# Allegro board LM3409 LED Driver for PC Flashlight.brd
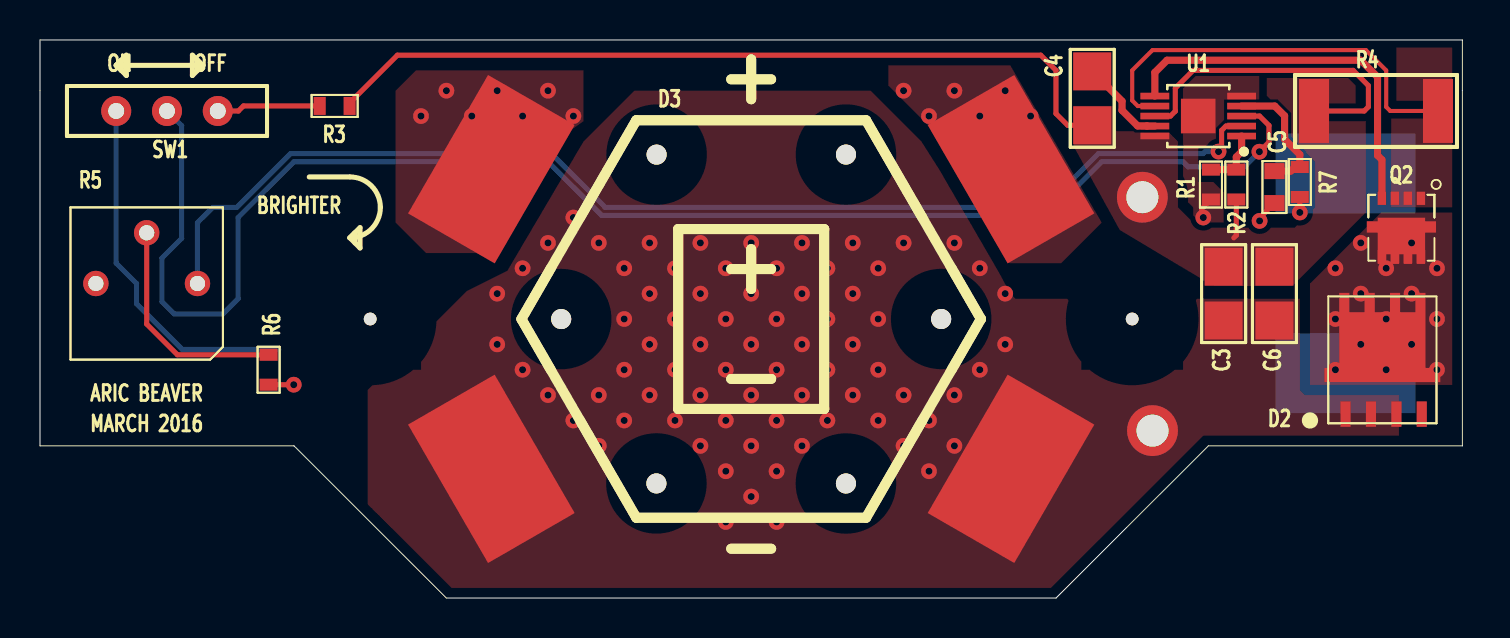
[diagram p0: board, top side]
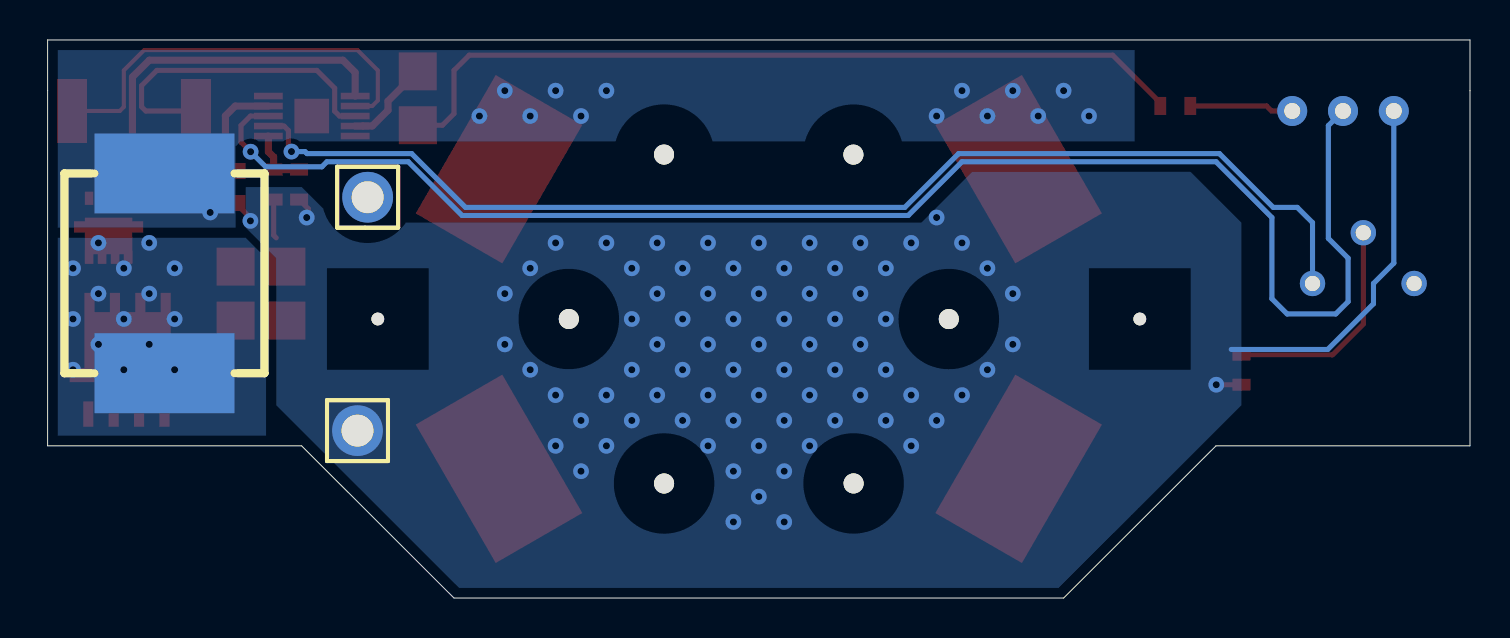
[diagram p1: board, bottom side, seen from below]

Outline 71.12 x 27.94 mm; copper layers: TOP, BOTTOM. Coordinates in mm from the lower left corner of the outline.
Outline path: 0,27.94 0,7.62 12.7,7.62 20.32,0 50.8,0 58.42,7.62 71.12,7.62 71.12,27.94 0,27.94

## Design rules (mm)
constraint set DEFAULT: min track width 0.254, pair gap 0.152

## Placement (name value [footprint] x y rotation side)
C3  4.7uF  [SMC0603-1206]  59.18 15.24 270 top
C4  1uF  [SMC0603-1206]  52.61 25.02 90 top
C5  470pF  [SMC0603]  61.72 20.57 270 top
C6  4.7uF  [SMC0603-1206]  61.72 15.24 270 top
D2  MBR860MFS  [P-TDSON-5]  65.28 9.14 90 top
D3  SST-50  [LUMINUS_SST-50]  35.56 13.97 0 top
L3  16uH  [IND_10X10MM]  65.28 16.26 90 bottom
NOREF  -  []  20.32 0 90 top
NOREF#2  -  []  58.42 7.62 0 top
NOREF#3  -  []  16.51 13.97 0 top
NOREF#4  -  []  0 14.04 0 top
NOREF#5  -  [unnamed#2]  54.61 13.97 0 top
NOREF#6  -  []  0 27.94 0 top
NOREF#7  -  []  -39.37 -150.88 0 top
NOREF#8  -  [unnamed#2]  16.51 13.97 0 top
NOREF#9  -  []  71.12 7.62 90 top
NOREF#10  -  []  16.51 13.97 90 top
Q2  NTTFS5116PL  [USMM_WDFN08_3P3X3P3X0P65P]  68.07 18.54 0 top
R1  ?  [SMR0603]  58.55 20.7 270 top
R2  10k  [SMR0603]  59.82 20.7 90 top
R3  10k  [SMR0603]  14.73 24.64 180 top
R4  50m  [SMR2512]  66.8 24.38 0 top
R5  250k  [TH_TPOT_300X300]  7.87 15.75 0 top
R6  5k  [SMR0603]  11.43 11.43 270 top
R7  17.4k  [SMR0603]  62.99 20.83 90 top
SW1  -  [450301014042]  8.89 24.38 270 top
TP1  TP  [TPTHI_100R63]  55.12 20.07 180 bottom
TP2  TP  [TPTHI_100R63]  55.63 8.38 180 bottom
U1  LM3409  [SOP50P490X109-11L24T173N]  57.91 24.13 90 top

## Library data of the parts
C3-C6 = CAP_NP
D2 = DIODE_SCHOTTKY_SO-8FL
D3 = LED_4PIN
L3 = INDUCTOR
Q2 = MOSFET_U8-FL P-CHANNEL
R1-R4 R6 R7 = RESISTOR
R5 = POT
SW1 = 450301014042
TP1 TP2 = TP
U1 = LM3409

## Footprints (pads in the part's own frame, mm; a bottom-side part is the same pattern mirrored in y, then rotated)
450301014042
  round 1.501 hole 0.8: 1(0,-2.54) 2(0,0) 3(0,-5.08)
IND_10X10MM
  rect 4x7 smd: 1(-5.001,0) 2(5.001,0)
LUMINUS_SST-50
  round 1.001 hole 4 unplated: (-9.5,-0.003) (-4.74,-8.232) (-4.729,8.23) (4.737,-8.235) (4.74,8.232) (9.5,0)
  rect 5.001x8.001 smd rot 30: 1(12.99,7.501) 3(-12.992,-7.501)
  rect 5.001x8.001 smd rot 150: 2(-12.992,7.501) 4(12.99,-7.501)
P-TDSON-5
  rect 1.27x0.508 smd: 1(0.064,0) 2(0.064,-1.27) 3(0.064,-2.54) 4(0.064,-3.81)
  custom 4.47x5.791 smd: 5(3.899,-1.841)
SMC0603
  rect 0.8x1.001 smd: 1(-0.8,0) 2(0.8,0)
SMC0603-1206
  rect 1.9x1.9 smd: 1(-1.349,0) 2(1.349,0)
SMR0603
  rect 0.599x0.899 smd: 1(-0.749,0) 2(0.749,0)
SMR2512
  rect 1.501x3.2 smd: 1(-3.099,0) 2(3.099,0)
SOP50P490X109-11L24T173N
  rect 0.33x1.44 smd: 1(-1.001,-2.169) 2(-0.5,-2.169) 3(0,-2.169) 4(0.5,-2.169) 5(1.001,-2.169) 6(1.001,2.169) 7(0.5,2.169) 8(0,2.169) 9(-0.5,2.169) 10(-1.001,2.169)
  rect 1.73x1.73 smd: 11(0,0)
TH_TPOT_300X300
  round 1.27 hole 0.762: 1(-5.08,0) 2(-2.54,2.54) 3(0,0)
TPTHI_100R63
  round 2.54 hole 1.6: 1(0,0)
unnamed#2
  round 0.635 hole 3.175 unplated: (0,0)
USMM_WDFN08_3P3X3P3X0P65P
  rect 0.419x0.66 smd: 1(0.975,1.471) 2(0.325,1.471) 3(-0.325,1.471) 4(-0.975,1.471) 5(-0.975,-1.471) 6(-0.325,-1.471) 7(0.325,-1.471) 8(0.975,-1.471)

## Nets
GND: C3.2 C5.2 C6.2 D2.1 D2.2 D2.3 D3.3 D3.4(C2) R1.2 R6.2 SW1.3 TP2.1 U1.5 U1.11
VIN: C3.1 C4.1 C6.1 R2.1 R3.1 R4.1 TP1.1 U1.8 U1.10(VIN)
VOUT: D3.1 D3.2 L3.2 R7.1
N13978220: R1.1 R2.2 U1.1
N13978864: R3.2 SW1.2
N13979032: Q2.4 U1.6
N13979038: D2.5 L3.1 Q2.5 Q2.6 Q2.7 Q2.8
N13979166: Q2.1 Q2.2 Q2.3(SOURCE#3) R4.2 U1.7
N13980696: C4.2 U1.9
N13981351: R5.3 U1.2
N13981365: R5.2(WIPER) R6.1
N13981523: SW1.1 U1.3
N13982907: C5.1 R7.2 U1.4

Pads without a net: D2 4; R5 1

## Via types
v1: diameter 0.787, hole 0.356, TOP to BOTTOM, 109 vias

## Routing (per net, layer and track width the routed paths; a pad name or vN(x,y) marks a point on that pad's centre or on a via; arc(x,y) is an arc through that point)
GND: length 21.7
  TOP w0.254: R1.2 58.09,19.49 58.09,19.13 v1(58.17,19.05) ; C5.2 60.98,19.03 v1(60.98,18.88) ; R6.2 v1(12.69,10.68)
  BOTTOM w0.254: 11.94,12.45 7.11,12.45 4.83,14.73 4.83,15.75 3.81,16.76 SW1.3
  vias: v1(22.86,15.24) v1(22.86,12.7) v1(24.13,16.51) v1(24.13,11.43) v1(25.4,17.78) v1(25.4,10.16) v1(26.67,19.05) v1(26.67,8.89) v1(27.94,17.78) v1(27.94,10.16) v1(27.94,7.62) v1(29.21,16.51) v1(29.21,13.97) v1(29.21,11.43) v1(29.21,8.89) v1(30.48,17.78) v1(30.48,15.24) v1(30.48,12.7) v1(30.48,10.16) v1(31.75,16.51) v1(31.75,13.97) v1(31.75,11.43) v1(31.75,8.89) v1(33.02,17.78) v1(33.02,15.24) v1(33.02,12.7) v1(33.02,10.16) v1(33.02,7.62) v1(34.29,16.51) v1(34.29,13.97) v1(34.29,11.43) v1(34.29,8.89) v1(34.29,6.35) v1(34.29,3.81) v1(35.56,17.78) v1(35.56,15.24) v1(35.56,12.7) v1(35.56,10.16) v1(35.56,7.62) v1(35.56,5.08) v1(36.83,16.51) v1(36.83,13.97) v1(36.83,11.43) v1(36.83,8.89) v1(36.83,6.35) v1(36.83,3.81) v1(38.1,17.78) v1(38.1,15.24) v1(38.1,12.7) v1(38.1,10.16) v1(38.1,7.62) v1(39.37,16.51) v1(39.37,13.97) v1(39.37,11.43) v1(39.37,8.89) v1(40.64,17.78) v1(40.64,15.24) v1(40.64,12.7) v1(40.64,10.16) v1(41.91,16.51) v1(41.91,13.97) v1(41.91,11.43) v1(41.91,8.89) v1(43.18,17.78) v1(43.18,10.16) v1(43.18,7.62) v1(44.45,8.89) v1(44.45,6.35) v1(45.72,17.78) v1(45.72,10.16) v1(45.72,7.62) v1(46.99,16.51) v1(46.99,11.43) v1(48.26,15.24) v1(48.26,12.7)
VIN: length 59.4
  TOP w0.254: 59.69,18.03 59.82,18.16 R2.1 ; R3.1 15.48,24.79 17.87,27.18 50.04,27.18 50.8,26.42 50.8,24.25 51.38,23.67 C4.1 ; R4.1 66.21,24.38 66.42,24.59 66.42,25.65 65.66,26.42 57.66,26.42 56.77,25.52 56.77,24.37 56.53,24.13 U1.8
VOUT: length 0.8
  TOP w0.254: R7.1 v1(62.99,19.3)
  vias: v1(19.05,24.13) v1(20.32,25.4) v1(21.59,24.13) v1(22.86,25.4) v1(24.13,24.13) v1(25.4,25.4) v1(26.67,24.13) v1(43.18,25.4) v1(44.45,24.13) v1(45.72,25.4) v1(46.99,24.13) v1(48.26,25.4) v1(49.53,24.13)
N13978220: length 3.1
  TOP w0.356: U1.1 60.08,22.34 59.82,22.08 R2.2 R1.1
N13978864: length 5.2
  TOP w0.254: R3.2 10.18,24.64 9.92,24.38 SW1.2
N13979032: length 19.1
  TOP w0.356: U1.6 55.74,26.31 56.35,26.92 66.04,26.92 66.88,26.09 66.88,22.16 67.1,21.94 Q2.4
N13979038:
  vias: v1(64.77,16.51) v1(64.77,13.97) v1(64.77,11.43) v1(66.04,17.78) v1(66.04,15.24) v1(66.04,12.7) v1(67.31,16.51) v1(67.31,13.97) v1(67.31,11.43) v1(68.58,17.78) v1(68.58,15.24) v1(68.58,12.7) v1(69.85,16.51) v1(69.85,13.97) v1(69.85,11.43)
N13979166: length 20.8
  TOP w0.203: R4.2 67.51,24.38 67.31,24.59 67.31,26.42 66.29,27.43 55.63,27.43 54.61,26.42 54.61,24.91 54.89,24.63 U1.7
N13980696: length 4.5
  TOP w0.356: U1.9 55.35,23.63 55.34,23.63 54.88,23.63 54.1,24.42 54.1,24.88 C4.2
N13981351: length 60
  TOP w0.254: v1(58.93,22.35) 59.08,22.5 59.08,23.41 59.3,23.63 U1.2
  BOTTOM w0.254: v1(58.93,22.35) 58.25,22.35 58.15,22.25 52.92,22.25 50.23,19.56 28.26,19.56 25.57,22.25 12.53,22.25 9.84,19.56 8.64,19.56 7.87,18.8 R5.3
N13981365: length 11.3
  TOP w0.254: R5.2 5.33,13.72 6.87,12.18 R6.1
N13981523: length 76.6
  TOP w0.254: U1.3 60.98,24.13 61.45,23.66 61.45,22.82 v1(60.97,22.34)
  BOTTOM w0.254: v1(60.97,22.34) 60.22,21.59 57.41,21.59 57.15,21.84 53.09,21.84 50.4,19.15 28.09,19.15 25.4,21.84 12.7,21.84 9.91,19.05 9.91,14.99 9.14,14.22 6.71,14.22 6.1,14.84 6.1,17.02 7.08,18 7.08,23.65 SW1.1
N13982907: length 6.6
  TOP w0.356: C5.1 62.53,21.37 62.74,21.58 R7.2 62.99,22.21 62.23,22.97 62.23,24.14 61.74,24.63 U1.4

## Copper pours and planes (outline as drawn; the poured copper is in the pictures)
GND on TOP: 57.15,20.07 57.66,19.56 57.66,18.8 57.91,18.54 59.18,18.54 59.18,20.32 58.67,20.83 57.91,20.83 57.91,22.61 59.44,22.61 59.44,24.89 60.96,24.89 60.96,26.42 57.15,26.42
GND on TOP: 67.94,10.16 67.94,8.13 58.17,8.13 50.55,0.51 20.57,0.51 16.38,4.7 16.38,10.41 21.34,15.37 23.37,16.38 27.18,22.86 29.72,25.4 41.53,25.4 44.07,22.86 44.96,21.46 47.75,16.64 47.98,16.24 48.51,15.24 48.77,14.99 62.99,14.99 62.99,10.41 63.25,10.16
GND on BOTTOM: 50.55,0.51 20.57,0.51 11.43,9.65 11.43,18.8 13.97,21.34 24.89,21.34 27.43,18.8 56.64,18.8 58.42,20.57 61.21,20.57 61.21,18.54 59.69,17.02 59.69,9.65
VIN on TOP: 58.67,15.62 62.61,15.62 66.29,19.3 66.29,23.88 64.26,23.88 64.26,24.77 65.79,24.77 65.79,25.65 65.41,26.04 61.34,26.04 61.34,25.15 62.48,24 62.48,23.11 63.75,21.84 63.75,19.56 62.74,18.54 57.91,18.54 56.9,19.56 56.9,22.86 56.39,23.37 53.85,23.37 53.66,23.56 53.66,24.57 53.59,24.64 51.69,24.64 51.69,22.61 53.99,18.42
VOUT on TOP: 48.51,26.67 42.42,26.67 42.42,25.65 44.45,23.62 48.48,16.75 48.5,16.76 51.05,16.76 53.09,18.8
VOUT on TOP: 17.78,25.4 17.78,18.8 19.3,17.27 22.95,17.27 25.15,21.08 26.45,23.36 27.18,23.88 27.18,26.42 18.8,26.42
VOUT on BOTTOM: 70.61,18.54 70.61,27.43 16.76,27.43 16.76,22.86 61.47,22.86 61.72,22.61 61.72,18.54
N13979038 on TOP (solid shape): 69.26,18.86 69.8,18.86 69.8,18.29 69.26,18.29 69.26,16.74 68.84,16.74 68.84,17.21 68.61,17.21 68.61,16.74 68.19,16.74 68.19,17.21 67.96,17.21 67.96,16.74 67.54,16.74 67.54,17.21 67.31,17.21 67.31,16.74 66.89,16.74 66.89,18.29 66.34,18.29 66.34,18.86 66.89,18.86 66.89,19.04 69.26,19.04
N13979038 on TOP: 70.61,19.3 67.06,19.3 63.5,15.75 63.5,10.67 70.61,10.67
N13979038 on BOTTOM: 70.61,8.13 70.61,18.03 61.21,18.03 60.2,17.02 60.2,8.13
N13979166 on TOP: 67.56,24 69.22,24 69.22,24.89 67.82,24.89 67.82,27.56 70.61,27.56 70.61,19.56 67.56,19.56

## Text on the board
Ref Des/Silkscreen Top: ARIC BEAVER | MARCH 2016 | ON       OFF | BRIGHTER
XSECTION_CHART: STACKUP TABLE | Unit = mils | # | 1 | 2 | NAME | TOP | BOTTOM | TYPE | SURFACE | CONDUCTOR | DIELECTRIC | MATERIAL | AIR | COPPER | FR-4 | TOTAL THICKNESS | THICKNESS | 0.0 | 1.7 | 58.0 | 61.4 | TOLERANCE | +0/-0
User.6: Porter Cable Flashlight
User.11: FIGURE | FINISHED_SIZE | 14.0 | 30.0 | 31.5 | 63.0 | 125.0 | 157.5 | DRILL CHART: TOP to BOTTOM | ALL UNITS ARE IN MILS | TOLERANCE_DRILL | +2.0/-6.0 | +3.0/-3.0 | +2.0/-2.0 | +4.0/-4.0 | +5.0/-5.0 | +7.9/-7.9 | PLATED | NON-PLATED | QTY | 109 | 3 | 2 | 6
